# EAGLE board Nusbio Test GPIOS Extension (EAGLE 9.6.2)

Size 64.03 x 50 mm. Coordinates in mm from the lower left corner, seen from the top.
Outline: 5,0 0,0 0,4
Outline: 60,0 64,0 64,5
Outline: 64,45 64,50 60,50
Outline: 6,50 0,50 0,45
Outline: 0,4 0,45
Outline: 0,45 arc-90 5,50 6,50
Outline: 6,50 60,50
Outline: 60,50 arc-90 64,45
Outline: 64,45 64,5
Outline: 64,5 arc-90 60,0
Outline: 60,0 5,0
Outline: 5,0 4,0 arc-90 0,4
Copper layers (1*16): Top 0.035mm / dielectric 1.5mm / Bottom 0.035mm
Design rules "default": minimum track width 10mil, minimum drill 24mil, track to track 8mil, track to pad 8mil, pad to pad 8mil, via to via 8mil, smd to smd 8mil, copper to edge 40mil, drill to drill 8mil, minimum pad ring 10mil, minimum via ring 8mil, stop-mask expansion 4mil, vias tented up to drill 0mil, thermal gap 10mil

## Footprints (pad centres in the part's own frame; a part is rotated, then mirrored left to right if it is on the bottom)
SOLDERJUMPER_REFLOW = smd 1.168 x 1.6: 1 -0.762,0; 2 0.762,0
1X10-BIG = drill 1.016 pad 1.778 octagon: 1 -11.43,0; 2 -8.89,0; 3 -6.35,0; 4 -3.81,0; 5 -1.27,0; 6 1.27,0; 7 3.81,0; 8 6.35,0; 9 8.89,0; 10 11.43,0
1206 = smd 1.6 x 1.803: A -1.422,0; C 1.422,0
R1206 = smd 1.6 x 1.803: 1 -1.422,0; 2 1.422,0
SIP9 = drill 0.6 long: 1 -11.46,0; 2 -8.92,0; 3 -6.38,0; 4 -3.84,0; 5 -1.3,0; 6 1.24,0; 7 3.78,0; 8 6.32,0; 9 8.86,0

## Placement (x,y rotation side)
GPIO_0_4_CONN  [SOLDERJUMPER_REFLOW]  47,14 180 top
GPIO_1_5_CONN  [SOLDERJUMPER_REFLOW]  37,14 180 top
GPIO_2_6_CONN  [SOLDERJUMPER_REFLOW]  27,14 180 top
GPIO_3_7_CONN  [SOLDERJUMPER_REFLOW]  16.29,13.66 180 top
GPIO_IN  PINHD-1X10  [1X10-BIG]  31.79,2 180 top
LED_0  [1206]  10.55,28.3 180 top
LED_1  [1206]  24.08,28.16 180 top
LED_2  [1206]  37,28 180 top
LED_3  [1206]  51,28 180 top
LED_POWER  [1206]  34.87,34.05 180 top
R_4K0  [R1206]  16.67,19.43 0 top
R_4K1  [R1206]  27.5,19.5 0 top
R_4K2  [R1206]  37.5,19.5 0 top
R_4K3  [R1206]  46.5,19.5 0 top
R_ARRAY  [SIP9]  3,21 270 top

## Library data of the parts
GPIO_0_4_CONN GPIO_1_5_CONN GPIO_2_6_CONN GPIO_3_7_CONN = microbuilder
GPIO_IN LED_0 LED_1-LED_3 LED_POWER R_4K0 R_4K1-R_4K3 = adafruit
R_ARRAY = resistor-sip

## Nets
GND: GPIO_IN.10 R_ARRAY.1
GPIO0: GPIO_0_4_CONN.1 GPIO_IN.1 LED_0.A
GPIO1: GPIO_1_5_CONN.1 GPIO_IN.2 LED_1.A
GPIO2: GPIO_2_6_CONN.1 GPIO_IN.3 LED_2.A
GPIO3: GPIO_3_7_CONN.1 GPIO_IN.4 LED_3.A
GPIO4: GPIO_IN.5 R_4K3.2
GPIO5: GPIO_IN.6 R_4K2.2
GPIO6: GPIO_IN.7 R_4K1.2
GPIO7: GPIO_IN.8 R_4K0.2
N$1: GPIO_3_7_CONN.2 R_4K0.1
N$2: GPIO_2_6_CONN.2 R_4K1.1
N$3: GPIO_1_5_CONN.2 R_4K2.1
N$4: GPIO_0_4_CONN.2 R_4K3.1
R_LED_0: LED_0.C R_ARRAY.2
R_LED_1: LED_1.C R_ARRAY.3
R_LED_2: LED_2.C R_ARRAY.4
R_LED_3: LED_3.C R_ARRAY.5
R_LED_PWR: LED_POWER.C R_ARRAY.6
VCC: GPIO_IN.9 LED_POWER.A

## Tracks (layer width: path | path; a pad name or v marks a point on that pad's centre or on a via)
GND  (1 unrouted)
GPIO0  (2 unrouted)
GPIO1  (2 unrouted)
GPIO2  (2 unrouted)
GPIO3  (2 unrouted)
GPIO4  (1 unrouted)
GPIO5  (1 unrouted)
GPIO6  (1 unrouted)
GPIO7  (1 unrouted)
N$1  (1 unrouted)
N$2  (1 unrouted)
N$3  (1 unrouted)
N$4  (1 unrouted)
R_LED_0  (1 unrouted)
R_LED_1  (1 unrouted)
R_LED_2  (1 unrouted)
R_LED_3  (1 unrouted)
R_LED_PWR  (1 unrouted)
VCC  (1 unrouted)

## Text on the board
tNames: GND | POWER | + | GND | VCC | G 7 | G 6 | G 5 | G 4 | G 3 | G 2 | G 1 | G 0
bNames: PCBv2 - 2023.04 | www.FredericTorres.com